# EAGLE board solr (EAGLE 7.3.0)
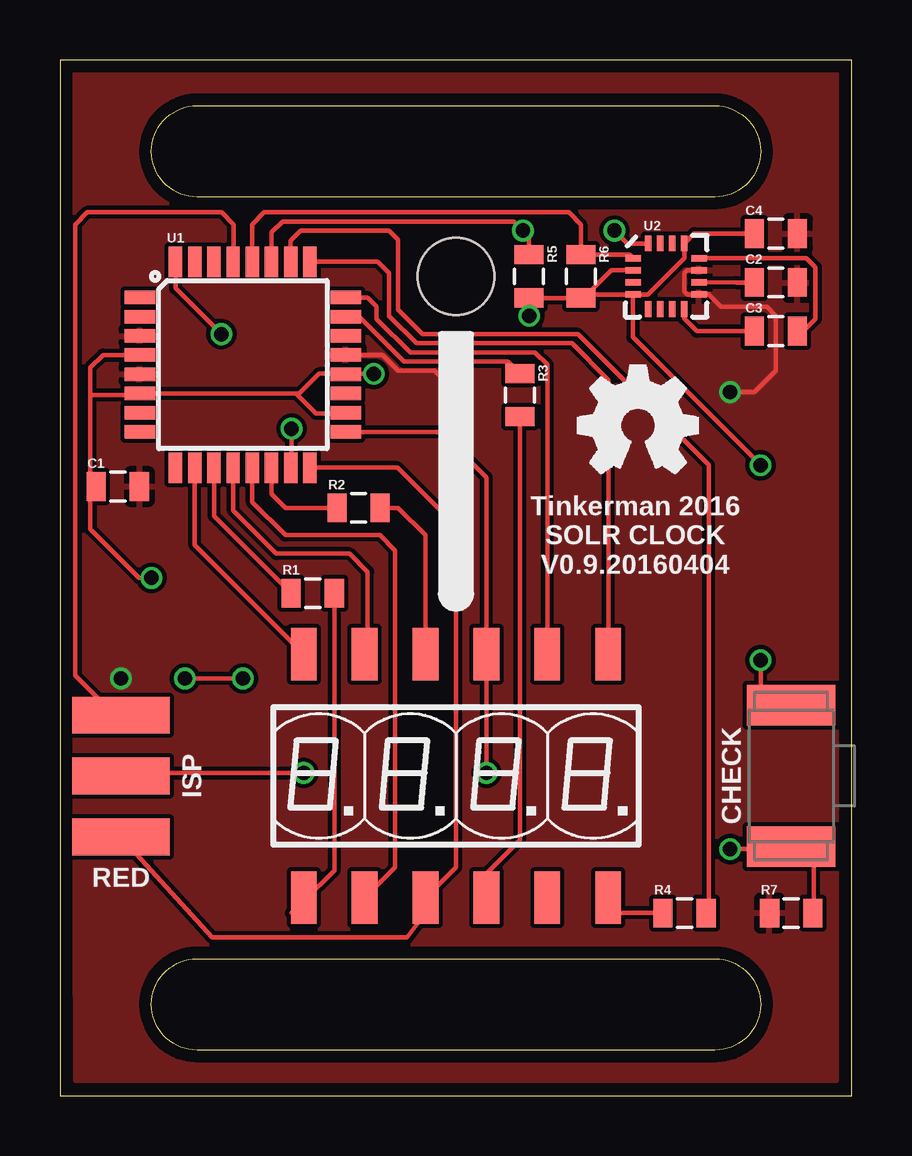
[diagram p0: board, top side]
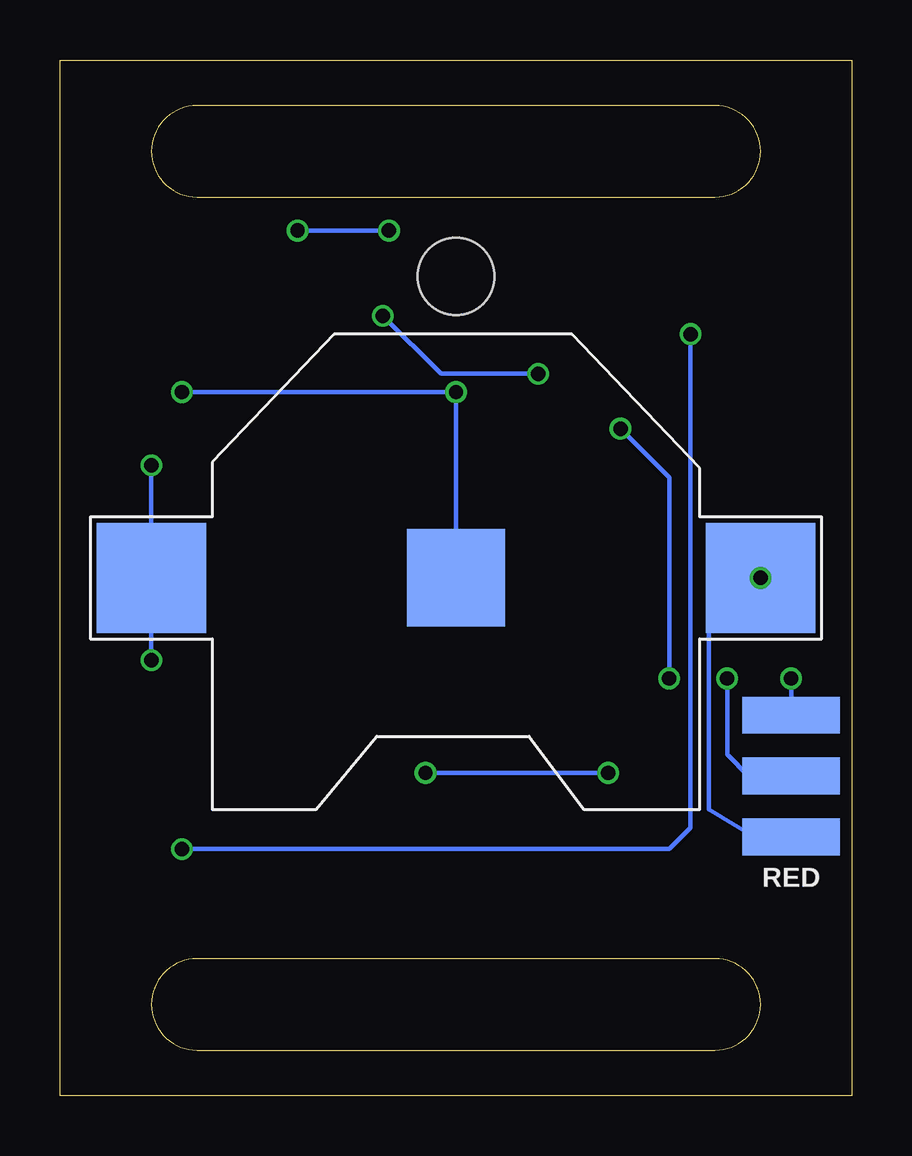
[diagram p1: board, bottom side, seen from below]

Size 33.02 x 43.18 mm. Coordinates in mm from the lower left corner, seen from the top.
Outline: 0,0 33.02,0 33.02,43.18 0,43.18 0,0
Outline: 5.71,41.27 27.3,41.27 arc-90 29.21,39.37 arc-90 27.3,37.47 5.71,37.47 arc-90 3.81,39.37 arc-90 5.71,41.27
Outline: 5.71,5.71 27.3,5.71 arc-90 29.21,3.81 arc-90 27.3,1.91 5.71,1.91 arc-90 3.81,3.81 arc-90 5.71,5.71
Copper layers (1*16): Top 0.035mm / dielectric 1.5mm / Bottom 0.035mm
Design rules "EagleRules": minimum track width 7mil, minimum drill 12mil, track to track 7mil, track to pad 7mil, pad to pad 7mil, via to via 7mil, smd to smd 0mil, copper to edge 20mil, drill to drill 10mil, minimum pad ring 10mil, minimum via ring 6mil, stop-mask expansion 2mil, vias tented up to drill 25mil, thermal gap 10mil
Holes 3.2 mm at 16.51,34.16

## Footprints (pad centres in the part's own frame; a part is rotated, then mirrored left to right if it is on the bottom)
CR2032-SMD = smd 4.572 x 4.572: +$1 -12.7,0; +$2 12.7,0 | smd 4.064 x 4.064: - 0,0
0805 = smd 0.8 x 1.2: 1 -0.9,0; 2 0.9,0
BTN_CK_KSS = smd 1.7 x 3.7: P$1 -2.95,0; P$2 2.95,0
2X3EDGE = smd 1.524 x 4.064: 1 2.54,0; 3 0,0; 5 -2.54,0 | smd 1.524 x 4.064 bottom: 2 2.54,0; 4 0,0; 6 -2.54,0
5082-7414 = smd 1.067 x 2.184: P$1 0,-1.27; P$2 2.54,-1.27; P$3 5.08,-1.27; P$4 7.62,-1.27; P$5 10.16,-1.27; P$6 12.7,-1.27; P$7 12.7,8.89; P$8 10.16,8.89; P$9 7.62,8.89; P$10 5.08,8.89; P$11 2.54,8.89; P$12 0,8.89
TQFP32-08 = smd 1.27 x 0.559: 1 -4.293,2.8; 2 -4.293,2; 3 -4.293,1.2; 4 -4.293,0.4; 5 -4.293,-0.4; 6 -4.293,-1.2; 7 -4.293,-2; 8 -4.293,-2.8; 17 4.293,-2.8; 18 4.293,-2; 19 4.293,-1.2; 20 4.293,-0.4; 21 4.293,0.4; 22 4.293,1.2; 23 4.293,2; 24 4.293,2.8 | smd 0.559 x 1.27: 9 -2.8,-4.293; 10 -2,-4.293; 11 -1.2,-4.293; 12 -0.4,-4.293; 13 0.4,-4.293; 14 1.2,-4.293; 15 2,-4.293; 16 2.8,-4.293; 25 2.8,4.293; 26 2,4.293; 27 1.2,4.293; 28 0.4,4.293; 29 -0.4,4.293; 30 -1.2,4.293; 31 -2,4.293; 32 -2.8,4.293
16LPCC = smd 0.65 x 0.28: 1 -1.37,0.75; 2 -1.37,0.25; 3 -1.37,-0.25; 4 -1.37,-0.75; 9 1.37,-0.75; 10 1.37,-0.25; 11 1.37,0.25; 12 1.37,0.75 | smd 0.28 x 0.65: 5 -0.75,-1.37; 6 -0.25,-1.37; 7 0.25,-1.37; 8 0.75,-1.37; 13 0.75,1.37; 14 0.25,1.37; 15 -0.25,1.37; 16 -0.75,1.37

## Placement (x,y rotation side)
BATT  [CR2032-SMD]  16.51,21.59 180 bottom
C1  100nF  [0805]  2.41,25.4 0 top
C2  4.7uF  [0805]  29.84,33.91 0 top
C3  22nF  [0805]  29.84,31.88 0 top
C4  100nF  [0805]  29.84,35.94 0 top
CHECK  [BTN_CK_KSS]  30.48,13.34 90 top
J1  ISP  [2X3EDGE]  2.54,13.34 270 top
LED1  5082-7414  [5082-7414]  10.16,9.53 0 top
R1  220  [0805]  10.54,20.95 0 top
R2  220  [0805]  12.45,24.51 0 top
R3  220  [0805]  19.18,29.21 270 top
R4  220  [0805]  26.04,7.62 0 top
R5  4K7  [0805]  19.56,34.16 270 top
R6  4K7  [0805]  21.72,34.16 270 top
R7  4K7  [0805]  30.48,7.62 0 top
U1  ATMEGA328P  [TQFP32-08]  7.62,30.48 0 top
U2  HMC5883L  [16LPCC]  25.27,34.16 0 top

## Library data of the parts
BATT C1-C4 J1 LED1 R1-R7 = xose
CHECK = adafruit
U1 = xose; PROD_ID: IC-09069
U2 = xose; PROD_ID: IC-10284

## Nets
BTN: CHECK.P$1 R7.2 U1.32
C1: R1.1 U1.11
C2: R2.1 U1.14
C3: R3.1 U1.23
C4: R4.2 U1.26
GND: BATT.- C1.2 C2.2 C4.2 J1.6 R7.1 U1.3 U1.5 U1.21 U2.9 U2.11
MISO: J1.1 LED1.P$3 U1.16
MOSI: J1.4 U1.15
N$1: LED1.P$1 R1.2
N$2: C3.1 U2.8
N$3: LED1.P$10 R2.2
N$4: LED1.P$4 R3.2
N$5: LED1.P$6 R4.1
N$8: C3.2 U2.12
N$9: C2.1 U2.10
RST: J1.5 U1.29
SA: LED1.P$12 U1.10
SB: LED1.P$11 U1.12
SCK: J1.3 LED1.P$9 U1.17
SCL: R6.1 U1.28 U2.1
SD: LED1.P$8 U1.24
SDA: R5.1 U1.27 U2.16
SE: LED1.P$2 U1.13
SG: LED1.P$7 U1.25
VCC: BATT.+$1 BATT.+$2 C1.1 C4.1 CHECK.P$2 J1.2 R5.2 R6.2 U1.4 U1.6 U1.18 U1.20 U2.2 U2.4 U2.13

## Tracks (layer width: path | path; a pad name or v marks a point on that pad's centre or on a via)
BTN  (via drill 0.6)
  Top 0.191: 31.43,7.67 31.43,10.16 | CHECK.P$1 30.38,10.29 v27.94,10.29 | v6.73,31.75 4.82,33.66 U1.32
  Top 0.254: R7.2 31.43,7.67 | 31.43,10.16 31.21,10.38 CHECK.P$1
  Bottom 0.191: v27.94,10.29 7.62,10.29 6.73,11.18 v6.73,31.75
C1
  Top 0.191: R1.1 6.42,24.18 U1.11
C2
  Top 0.191: R2.1 9.4,24.51 8.82,25.09 U1.14
C3
  Top 0.191: R3.1 18.68,30.61 14.35,30.61 12.48,32.48 U1.23
C4
  Top 0.191: R4.2 27.05,7.74 27.05,26.29 21.59,31.75 15.11,31.75 14.1,32.77 14.1,35.69 13.72,36.07 10.03,36.07 9.62,35.66 U1.26
GND  (via drill 0.6)
  Top 0.191: U2.11 26.17,34.41 26.16,34.42 26.04,34.29 26.04,33.53 26.16,33.4 U2.9 27.04,33.41 27.56,32.89 29.46,32.89 29.84,32.51 29.84,30.23 28.96,29.34 v27.94,29.34 | v16.51,29.34 15.62,30.23 14.1,30.23 13.44,30.88 U1.21
  Bottom 0.191: J1.6 v2.54,17.4 | BATT.- v16.51,29.34 v27.94,29.34
  pour Top: 0.51,42.67 0.64,0.64 32.38,0.64 32.38,42.67
MISO
  Top 0.191: U1.16 14.07,26.19 16.51,23.75 16.51,9.53 LED1.P$3 15.24,7.62 14.48,6.6 6.35,6.6 J1.1
MOSI  (via drill 0.6)
  Top 0.191: U1.15 9.65,26.22 v9.65,27.81 | v7.62,17.4 v5.21,17.4
  Bottom 0.191: v9.65,27.81 7.62,25.78 v7.62,17.4 | v5.21,17.4 5.21,14.22 4.32,13.34 J1.4
N$1
  Top 0.191: 9.65,7.62 10.16,8.13 | 10.16,8.13 LED1.P$1 | 10.16,8.13 11.44,9.41 R1.2
N$2
  Top 0.191: C3.1 26.54,31.88 26.02,32.4 U2.8
N$3
  Top 0.191: LED1.P$10 15.24,23.37 14.1,24.51 R2.2
N$4
  Top 0.191: LED1.P$4 17.78,9.27 19.18,10.67 R3.2
N$5
  Top 0.191: R4.1 22.86,7.62
  Top 0.254: 22.86,7.62 LED1.P$6
N$8
  Top 0.191: U2.12 26.91,34.92 31.11,34.92 31.5,34.54 31.5,32.38 30.99,31.88 C3.2
N$9
  Top 0.191: U2.10 28.17,33.91 C2.1
RST
  Top 0.191: U1.29 7.24,34.79 7.24,36.32 6.73,36.83 1.14,36.83 0.64,36.32 0.64,17.53 2.29,15.88 J1.5
SA
  Top 0.191: LED1.P$12 5.62,22.95 U1.10
SB
  Top 0.191: LED1.P$11 12.83,18.54 12.83,21.84 12.06,22.61 9.02,22.61 7.22,24.4 U1.12
SCK  (via drill 0.6)
  Top 0.191: U1.17 15.88,27.68 17.78,25.78 LED1.P$9 v17.78,13.46 | J1.3 2.67,13.46 v10.16,13.46
  Bottom 0.191: v10.16,13.46 v17.78,13.46
SCL
  Top 0.191: U1.28 8,34.79 8,36.32 8.51,36.83 21.21,36.83 21.72,36.32 R6.1 23.75,35.06 U2.1
SD
  Top 0.191: LED1.P$8 20.32,30.48 19.81,30.99 14.61,30.99 13.21,32.38 13.21,32.89 12.82,33.28 U1.24
SDA  (via drill 0.6)
  Top 0.191: U1.27 8.82,36 9.27,36.45 18.92,36.45 v19.3,36.07 19.56,35.81 R5.1 | 24.51,35.29 U2.16 23.65,35.53 v23.11,36.07
  Bottom 0.191: v19.3,36.07 v23.11,36.07
SE
  Top 0.191: LED1.P$2 13.97,9.53 13.97,22.73 13.34,23.37 9.4,23.37 8.02,24.75 U1.13
SG
  Top 0.191: LED1.P$7 22.86,29.84 21.34,31.37 14.86,31.37 13.72,32.51 13.72,34.29 13.23,34.77 U1.25
VCC  (via drill 0.6)
  Top 0.191: 29.53,16.51 29.21,16.83 v29.21,18.16 | C4.1 26.43,35.94 U2.13 26.02,34.91 24.51,33.4 U2.4 | U2.4 23.88,33.39 23.88,31.62 v29.21,26.29 | U2.4 | U2.4 23.88,33.4 23.74,33.39 22.23,33.39 | 22.23,33.39 R6.2 R5.2 v19.56,32.51 | U2.2 22.99,34.42 22.23,33.66 22.23,33.39 | 1.27,29.21 1.27,25.41 C1.1 1.27,25.39 1.27,23.62 3.3,21.59 BATT.+$1 | 1.27,29.21 1.27,30.35 1.8,30.88 U1.4 | 1.27,29.21 3.26,29.21 U1.6 9.84,29.28 | 11.93,30.1 v13.08,30.1 | U1.18 11.88,28.45 10.67,28.45 9.84,29.28 | U1.20 11.93,30.1 | 11.93,30.1 10.79,30.1 9.98,29.28 9.84,29.28
  Top 0.254: 29.53,16.51 29.75,16.29 CHECK.P$2
  Bottom 0.191: J1.2 4.06,10.79 5.97,11.94 5.97,20.19 BATT.+$1 3.81,21.84 | v29.21,18.16 BATT.+$2 v29.21,26.29 | v19.56,32.51 17.14,30.1 v13.08,30.1
  other vias: 3.81,21.59

## Text on the board
tPlace: Tinkerman 2016 / SOLR CLOCK / V0.9.20160404